# Altium PCB board6.PcbDoc
Units mil, origin at the board's own origin, x right, y up, seen from the top; angles counter-clockwise.
Board outline 1968.5 x 1181.1 mil, 6 copper layers (Top Layer, Mid-Layer 1, Internal Plane 1, Mid-Layer 3, Mid-Layer 4, Bottom Layer), stack 61.418 mil thick; 4 components, 4 nets, 15 pads, 3 vias.
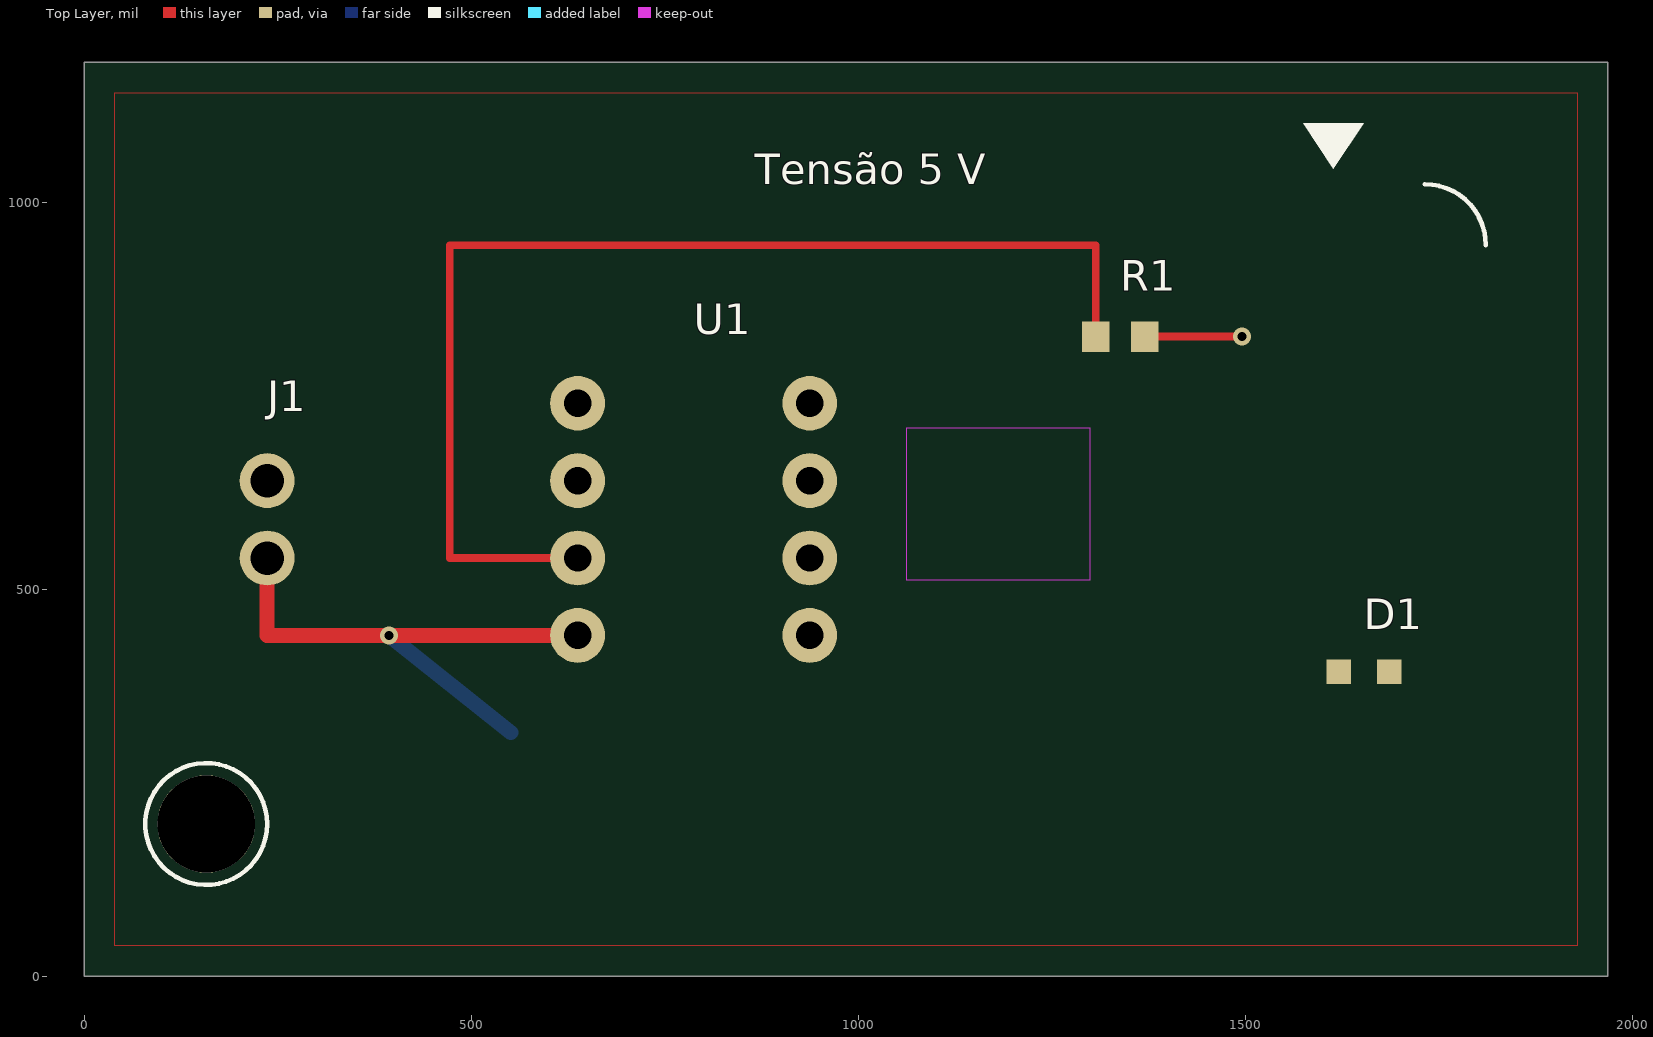
[diagram p0: Top Layer view]
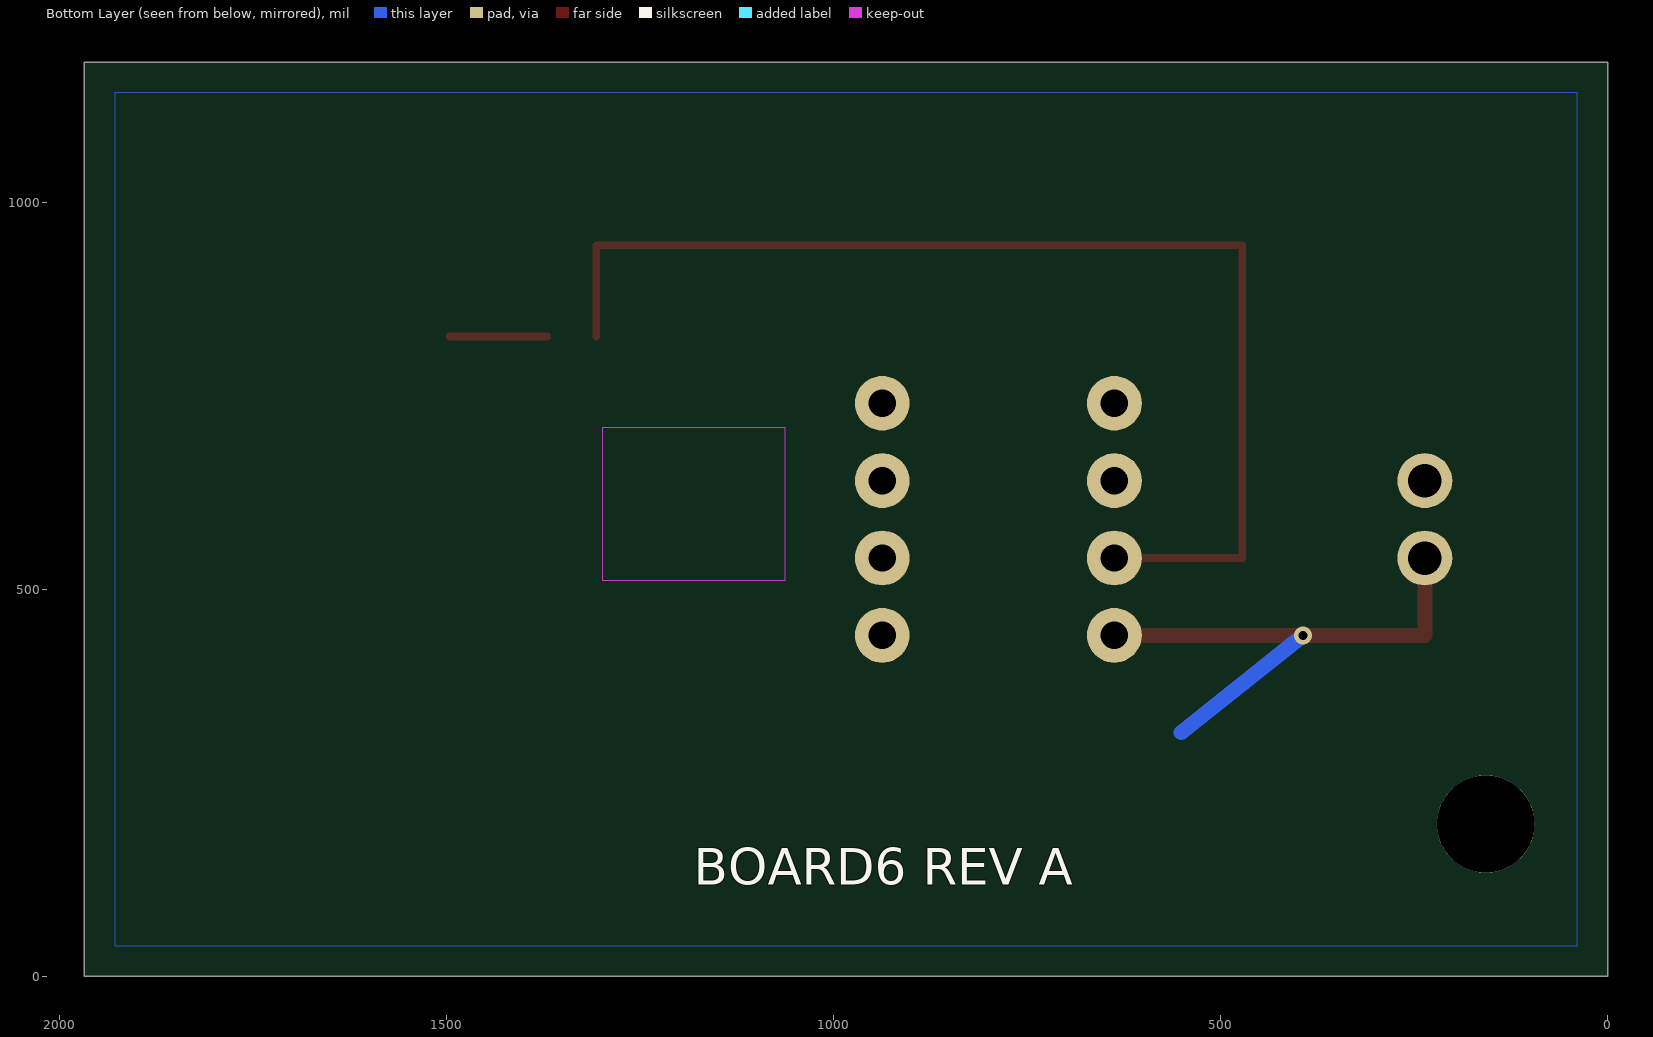
[diagram p1: Bottom Layer view, seen from below]
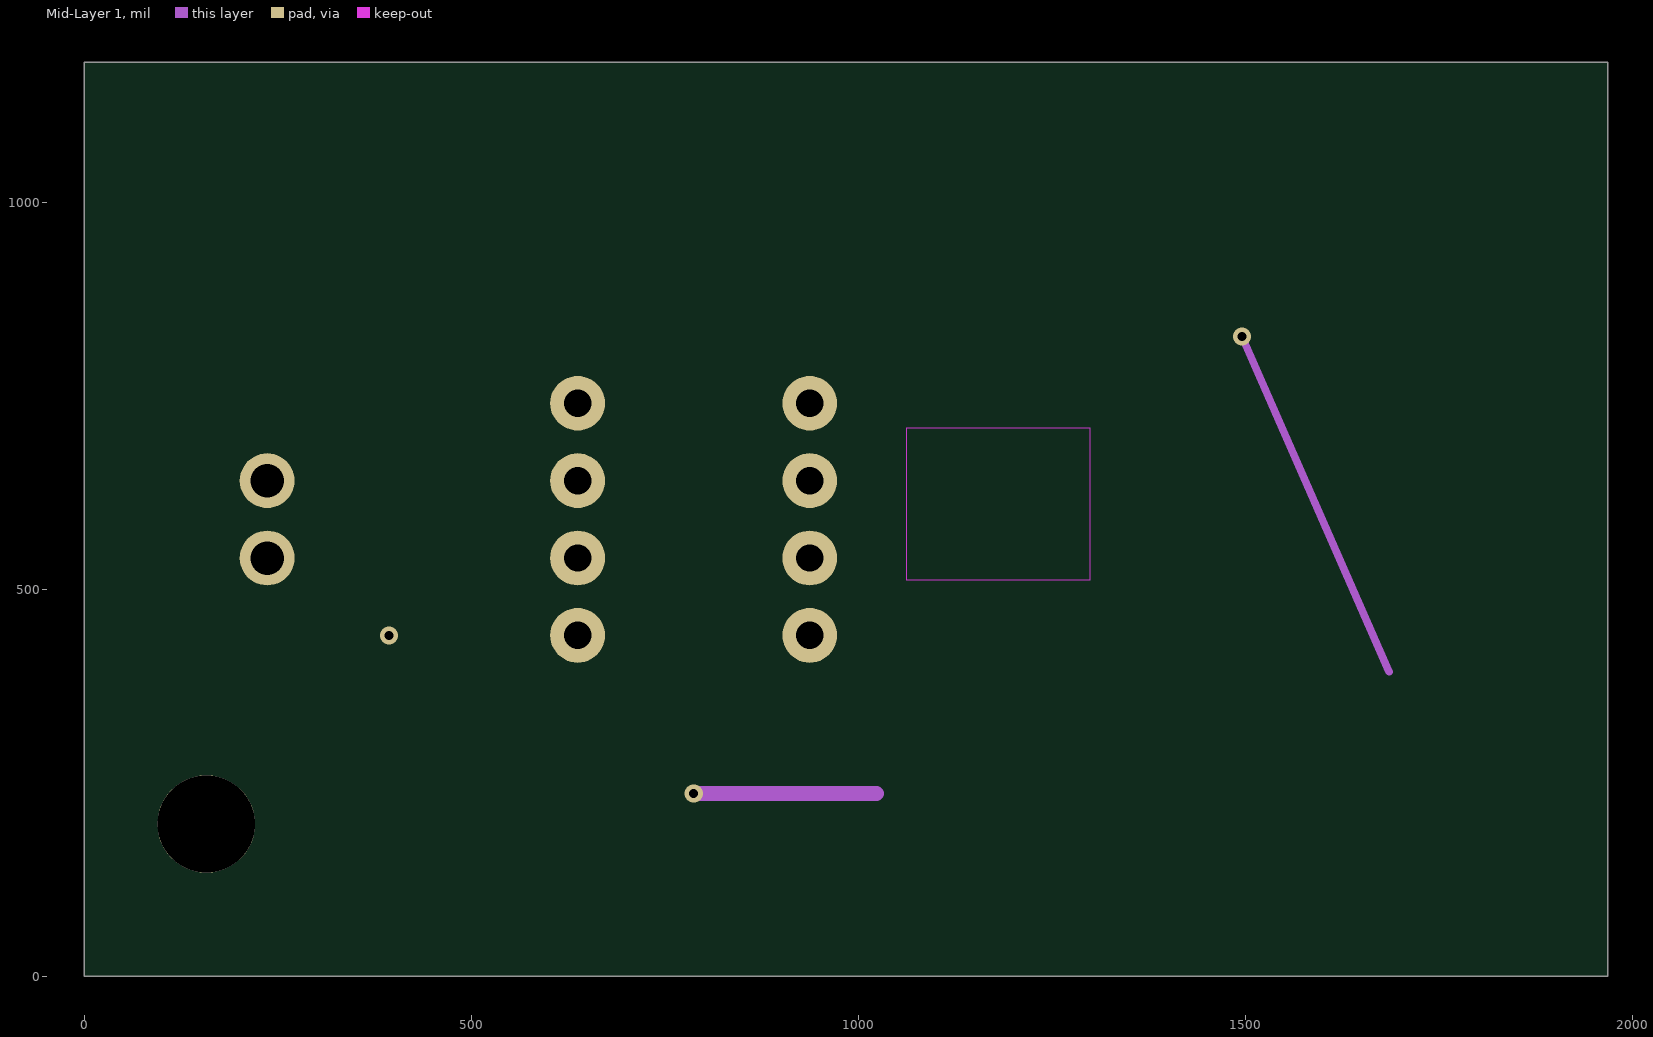
[diagram p2: Mid-Layer 1]
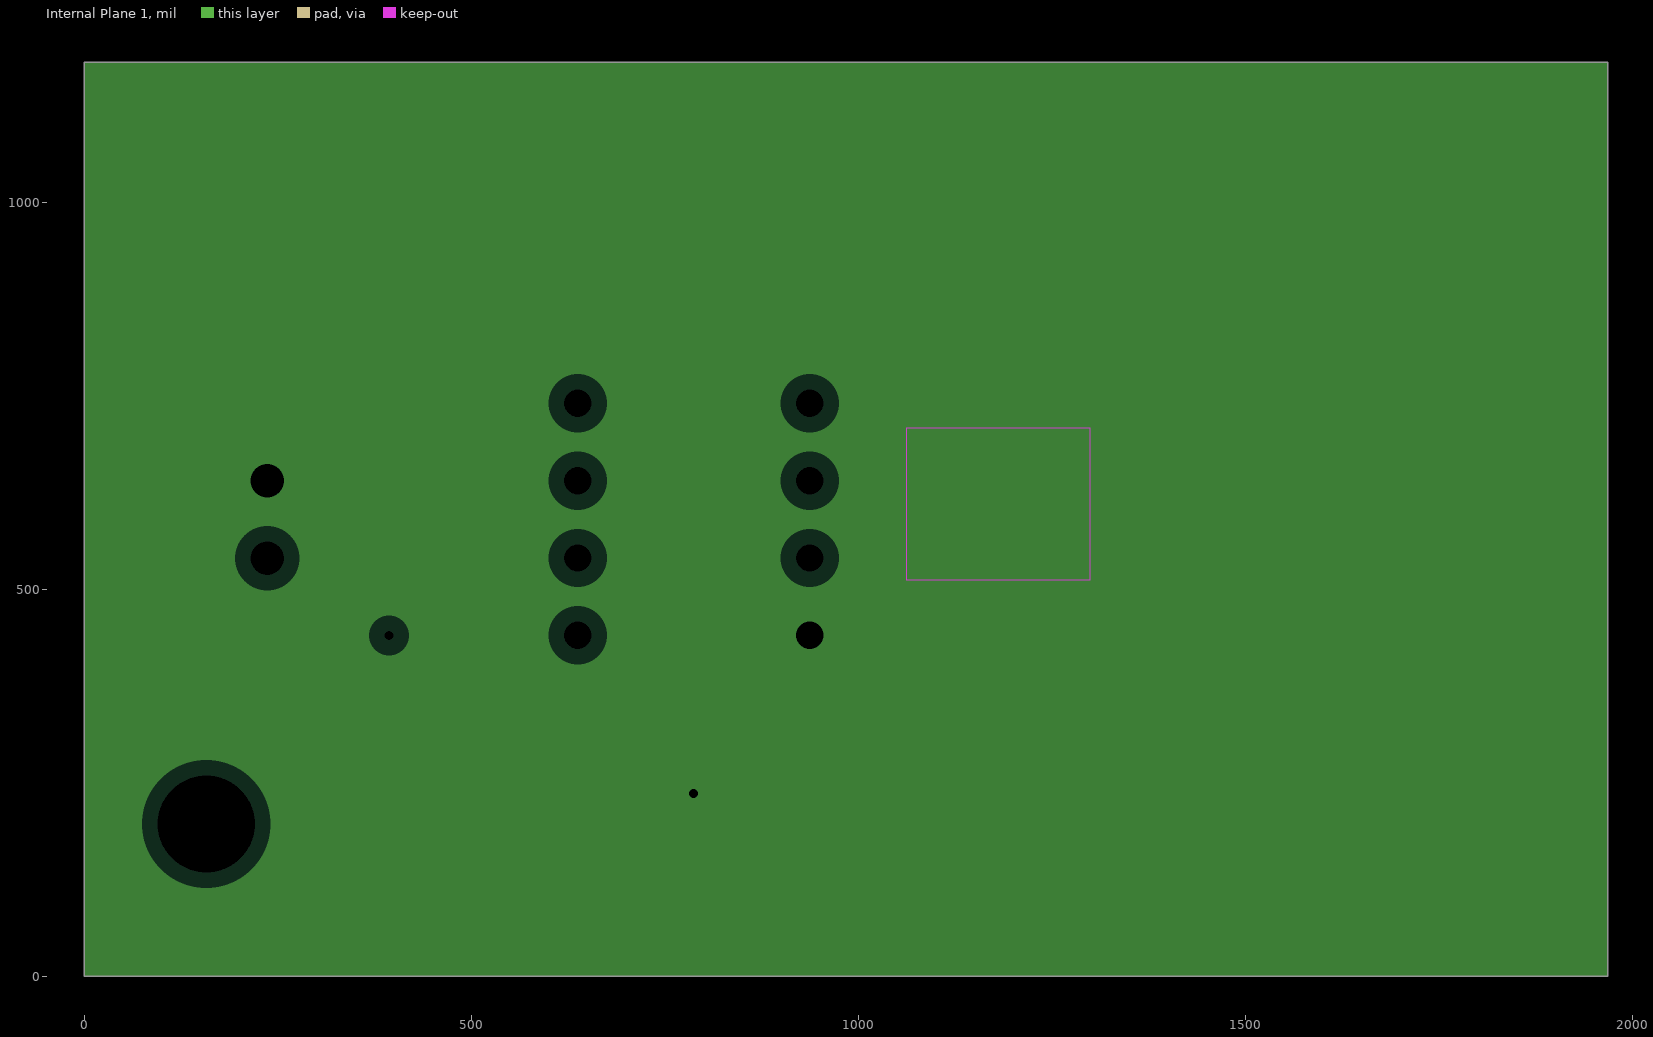
[diagram p3: Internal Plane 1, clearances drawn from the general rule]
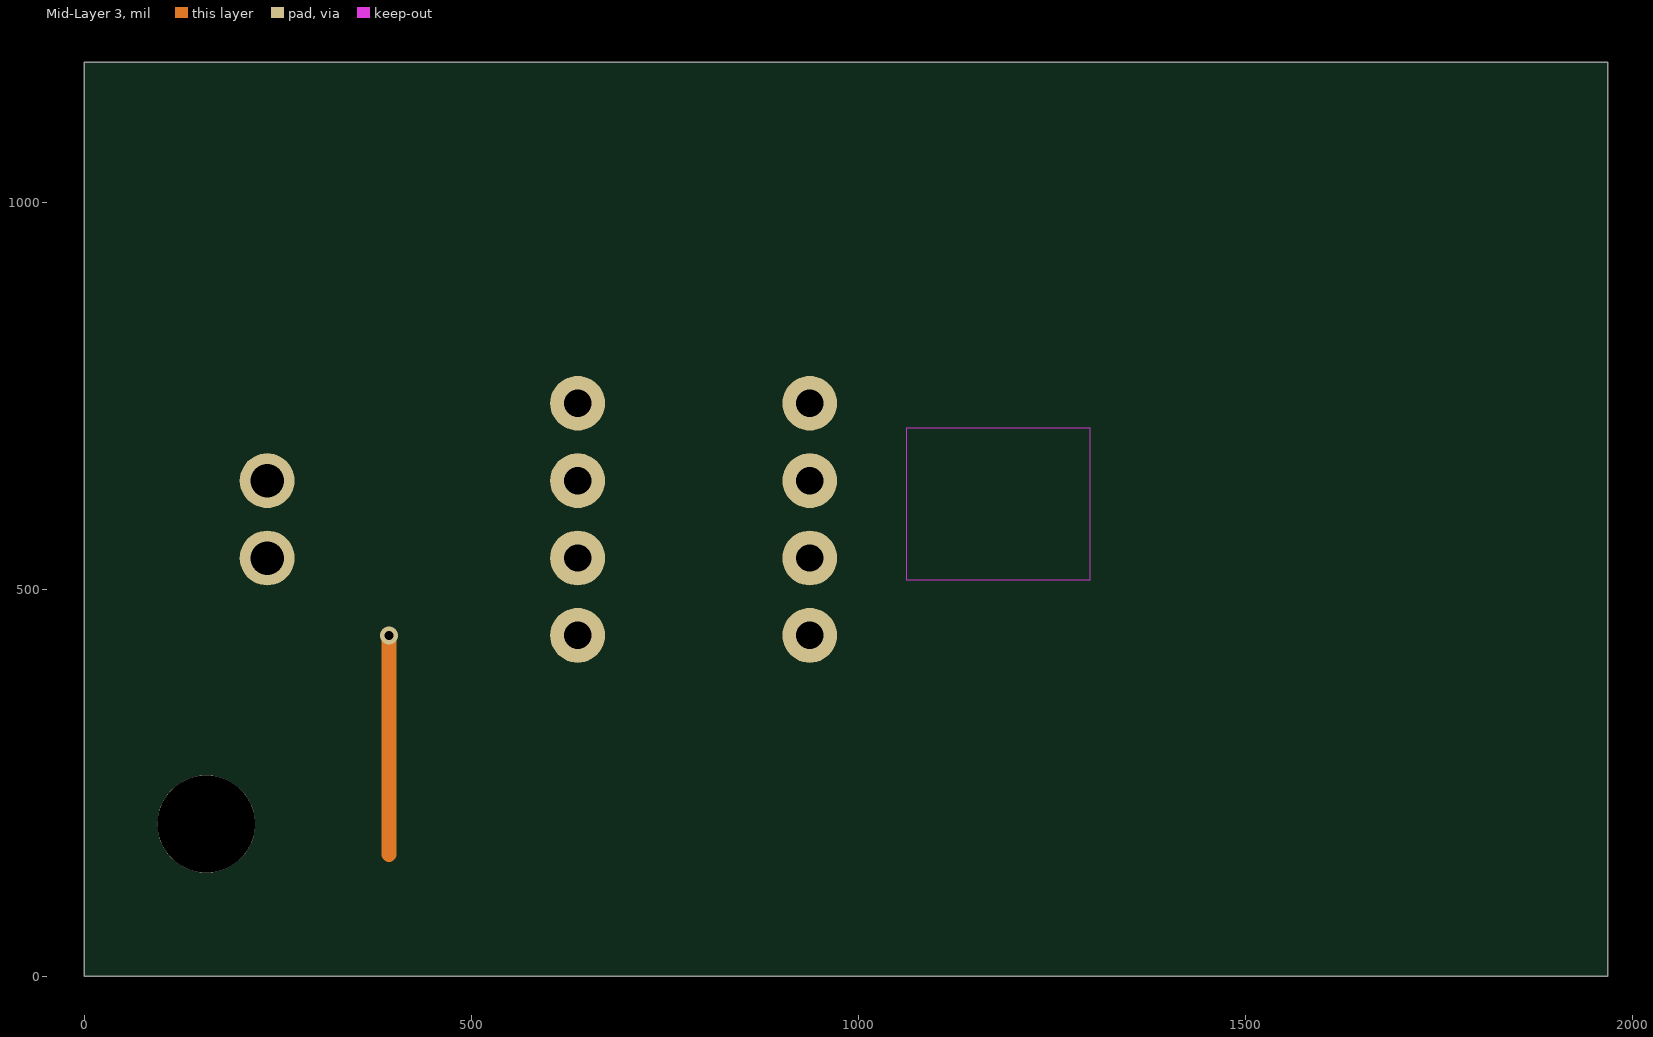
[diagram p4: Mid-Layer 3]
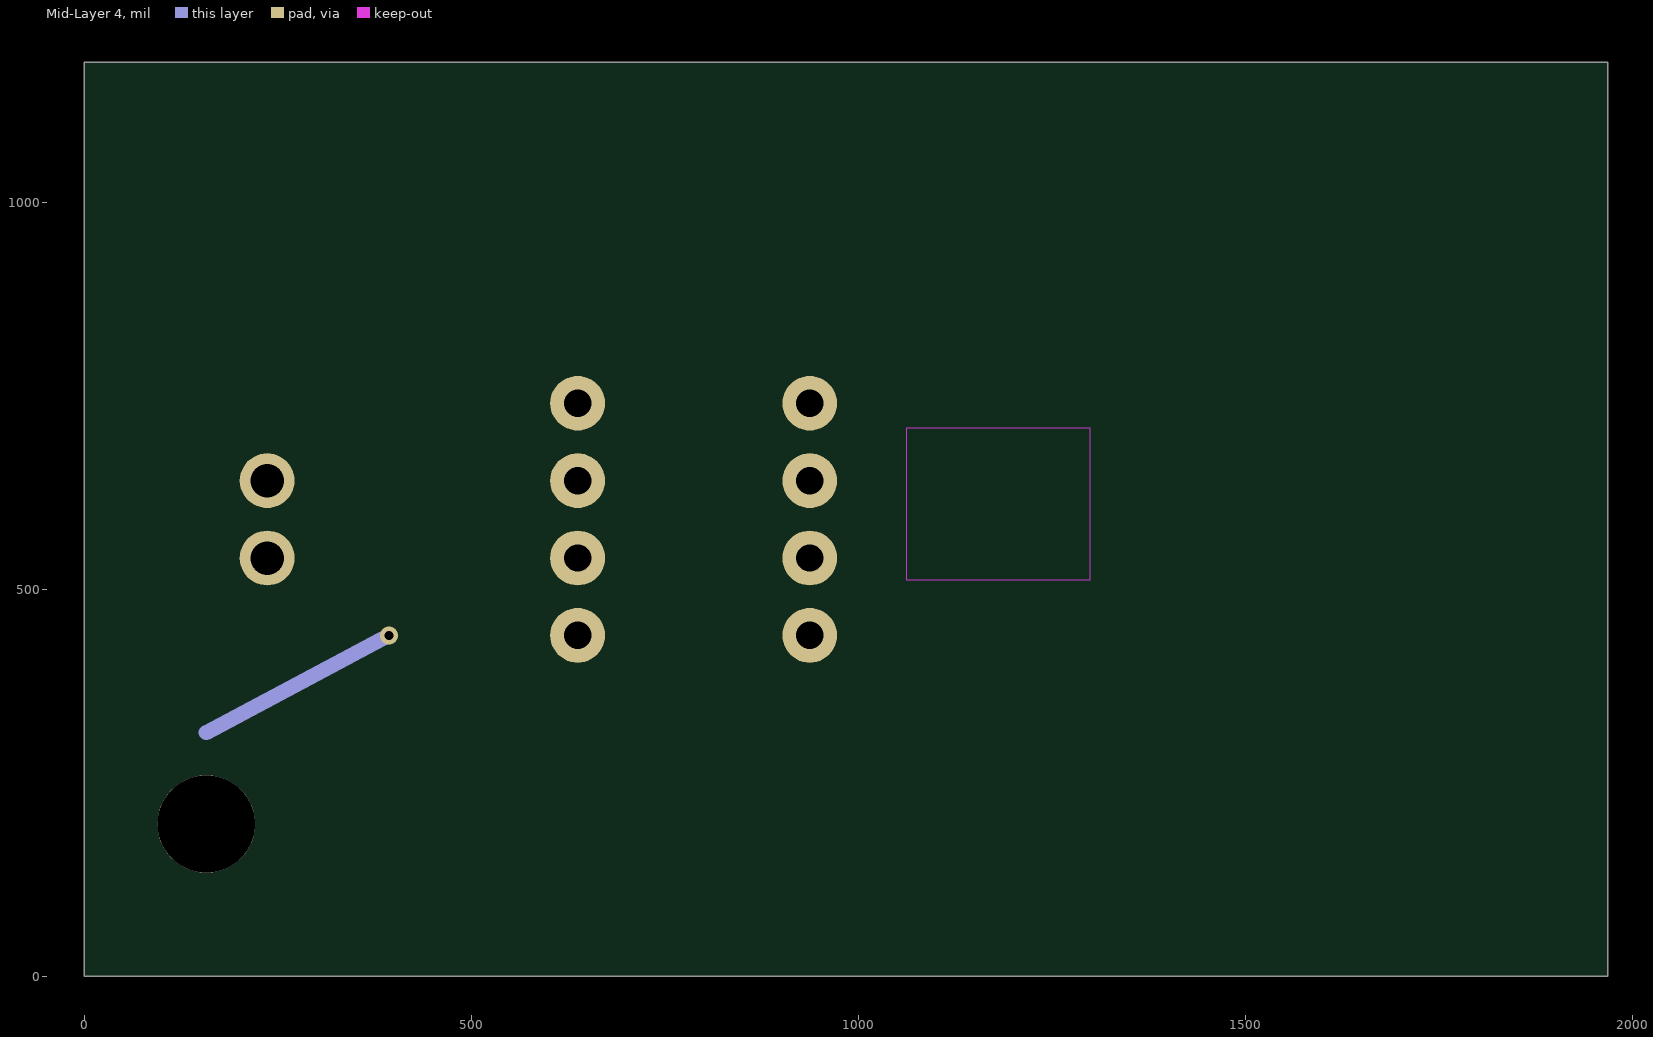
[diagram p5: Mid-Layer 4]

## Layer stack, top to bottom
Top Solder: solder mask 0.4, Solder Resist, Dk 3.5
Top Layer: signal copper 1.378
Dielectric 1: prepreg 4.3307, FR-4 prepreg, Dk 4.2
Mid-Layer 1: signal copper 0.689
Dielectric 2: core 7.874, FR-4 core, Dk 4.5
Internal Plane 1: plane copper 0.689, net GND
Dielectric 3: prepreg 31.4961, FR-4 prepreg, Dk 4.2
Mid-Layer 3: signal copper 0.689
Dielectric 4: core 7.874, FR-4 core, Dk 4.5
Mid-Layer 4: signal copper 0.689
Dielectric 5: prepreg 4.3307, FR-4 prepreg, Dk 4.2
Bottom Layer: signal copper 1.378
Bottom Solder: solder mask 0.4, Solder Resist, Dk 3.5

## Board outline
0,1181.1 1968.5,1181.1 1968.5,0 0,0

## Design rules (kind name [scope] priority, off if disabled: settings)
Clearance Clearance_PWR [InNetClass('PWR')] p1: gap=7.87 ignorepadtopadclearanceinfootprint=FALSE
Clearance [All] p2: gap=7.87 ignorepadtopadclearanceinfootprint=FALSE
RoutingVias [All] p1: holewidth=11.81 width=23.62 viastyle="Through Hole" minholewidth=11.81 minwidth=23.62 maxholewidth=11.81 maxwidth=23.62
Width Width_PWR [InNetClass('PWR')] p1: maxlimit=19.68 minlimit=19.68 preferedwidth=19.68
Width [All] p2: maxlimit=19.68 minlimit=9.84 preferedwidth=9.84

## Classes and differential pairs
net class PWR: GND VIN

## Components (designator, comment, footprint, x,y, rotation, side; value= is the part's Value field where it differs from the comment)
D1 "red" LED0603_Kingbright_APT1608SURCK 1653.54,393.7 r0 top
J1 "SUPPLY" Header_1x2_P2.54 236.22,590.55 r0 top
R1 "330" Chip_0603 1338.58,826.77 r0 top
U1 "MCU" DIP8_Microchip_P 787.4,590.55 r0 top locked

## Footprints (in the part's own frame and the unit in brackets; to place one, negate y for a bottom-side part, rotate by r counter-clockwise, add the part's x,y. Pads: shape width x height; smd on the part's side, far side on the other; paste and mask are expansions set on the pad)
Chip_0603 [mm]
  rect 0.9x1 smd: 1(-0.8,0) 2(0.8,0)
DIP8_Microchip_P [mm]
  round 1.8 hole 0.9: 1(-3.81,-3.81) 2(-3.81,-1.27) 3(-3.81,1.27) 4(-3.81,3.81) 5(3.81,3.81) 6(3.81,1.27) 7(3.81,-1.27) 8(3.81,-3.81)
Header_1x2_P2.54 [mm]
  round 1.8 hole 1.1: 1(0,-1.27) 2(0,1.27)
LED0603_Kingbright_APT1608SURCK [mm]
  rect 0.8x0.8 smd: 1(-0.825,0) 2(0.825,0)

## Part data
D1: library part LED
J1: library part Connector_2
R1: library part Resistor
U1: library part Microcontroller

## Free pads (board coordinates)
  round 125.98 hole 125.98 unplated: ""(157.48,196.85)

## Via types
v1: diameter 23.62, hole 11.81, Mid-Layer 1 to Internal Plane 1, 1 vias
v2: diameter 23.62, hole 11.81, Top Layer to Mid-Layer 1, 1 vias
v3: diameter 23.62, hole 11.81, Top Layer to Bottom Layer, 1 vias

## Nets (pads, with @x,y where several pads share a name; then routed paths per layer and width w, separated by ;. In a path a pad name is that pad's centre, name@x,y a point inside that pad or via, vN(x,y) a via of type N, cw(c..) or ccw(c..) an arc to the next point about the centre after c; other vN are vias at no path point)
GND: D1.1 J1.2 U1.8 | length 236.2
  Mid-Layer 1 w19.68: v1(787.4,236.22) 1023.62,236.22
LED_A: D1.2 R1.2 | length 598.9
  Top Layer w9.84: R1.2 v2(1496.06,826.77)
  Mid-Layer 1 w9.84: v2(1496.06,826.77) 1686.02,393.7
LED_DRV: R1.1 U1.2 | length 1522
  Top Layer w9.84: U1.2 472.44,540.55 472.44,944.88 1307.09,944.88 R1.1
VIN: J1.1 U1.1 | length 1253.2
  Top Layer w19.68: J1.1 236.22,440.55 U1.1
  Mid-Layer 3 w19.68: 393.7,157.48 v3(393.7,440.55)
  Mid-Layer 4 w19.68: 157.48,314.96 v3(393.7,440.55)
  Bottom Layer w19.68: v3(393.7,440.55) 551.18,314.96
pads on no net: U1.3 U1.4 U1.5 U1.6 U1.7

## Polygon pours and split planes (outlines as drawn)
GND on Top Layer "GND_L01_P000" (solid, remove dead copper, pour order 0): 39.37,1141.73 1929.13,1141.73 1929.13,39.37 39.37,39.37
GND on Bottom Layer "GND_L06_P001" (solid, remove dead copper, pour order 1): 39.37,1141.73 1929.13,1141.73 1929.13,39.37 39.37,39.37

## Keep-outs
Keep-Out Layer:
  region: 1062.99,708.66 1299.21,708.66 1299.21,511.81 1062.99,511.81

## Silkscreen, mask and mechanical layers (free items; w line width, h text height)
Top Overlay:
  circle w5.91: c157.48,196.85 r78.74
  region: 1574.8,1102.36 1653.54,1102.36 1614.17,1043.31
  lines w5.91: 1732.28,1023.62 cw(c1732.28,944.88) 1811.02,944.88
  text "Tensão 5 V" at 866.14,1023.62 h39.37
Bottom Overlay:
  text "BOARD6 REV A" at 1181.1,118.11 h47.24
Mechanical 13:
  lines w3.94: 78.74,1102.36 472.44,1102.36
  text "ASSEMBLY TOP" at 118.11,78.74 h31.5
Mechanical 14:
  lines w3.94: 1417.32,118.11 1732.28,118.11 1732.28,314.96 1417.32,314.96 1417.32,118.11
  text "BOTTOM" at 1850.39,708.66 h39.37 r90